# EAGLE board Qwiic_MCP9600-Panel (EAGLE 9.4.2)
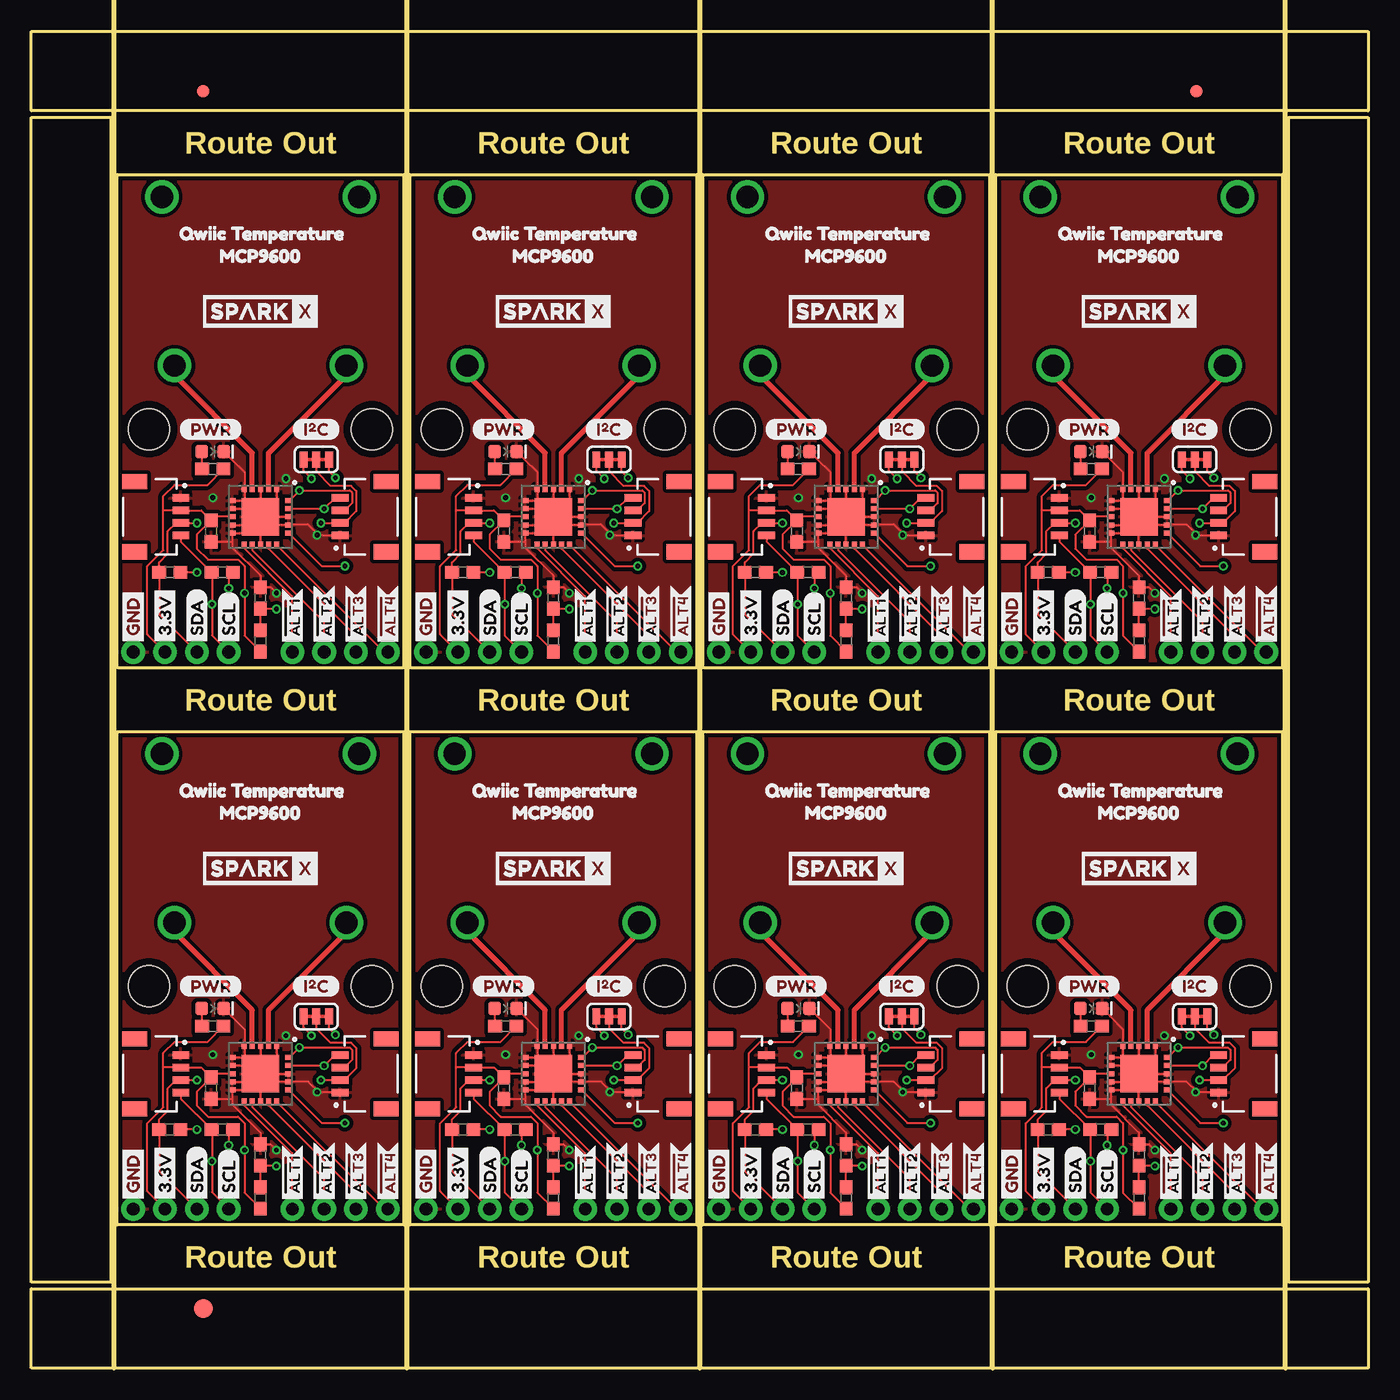
[diagram p0: board, top side]
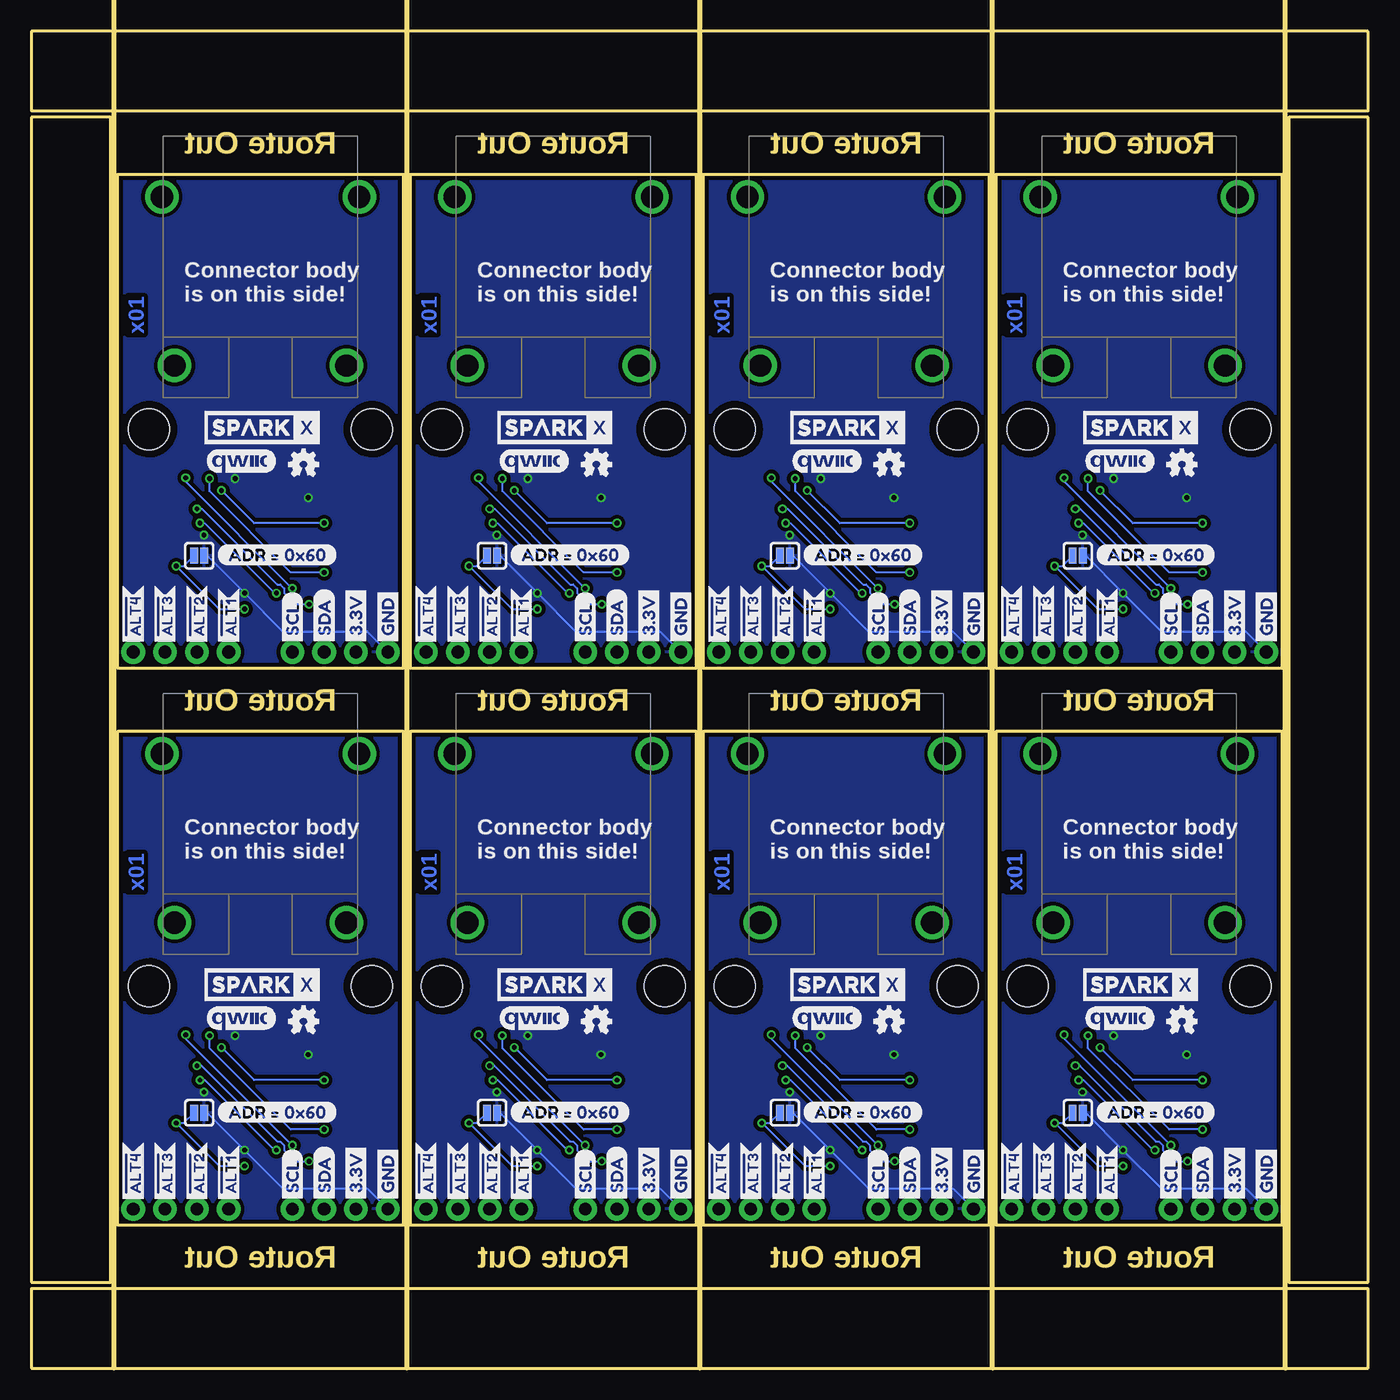
[diagram p1: board, bottom side, seen from below]

Size 106.68 x 106.68 mm. Coordinates in mm from the lower left corner, seen from the top.
Outline: 6.86,11.43 6.86,50.8 29.72,50.8 29.72,11.43 6.86,11.43
Outline: 30.23,11.43 30.23,50.8 53.09,50.8 53.09,11.43 30.23,11.43
Outline: 53.59,11.43 53.59,50.8 76.45,50.8 76.45,11.43 53.59,11.43
Outline: 76.96,11.43 76.96,50.8 99.82,50.8 99.82,11.43 76.96,11.43
Outline: 6.86,55.88 6.86,95.25 29.72,95.25 29.72,55.88 6.86,55.88
Outline: 30.23,55.88 30.23,95.25 53.09,95.25 53.09,55.88 30.23,55.88
Outline: 53.59,55.88 53.59,95.25 76.45,95.25 76.45,55.88 53.59,55.88
Outline: 76.96,55.88 76.96,95.25 99.82,95.25 99.82,55.88 76.96,55.88
Outline: 0,6.35 106.68,6.35 106.68,0 0,0 0,6.35
Outline: 100.33,99.82 106.68,99.82 106.68,6.86 100.33,6.86 100.33,99.82
Outline: 0,106.68 106.68,106.68 106.68,100.33 0,100.33 0,106.68
Outline: 0,99.82 6.35,99.82 6.35,6.86 0,6.86 0,99.82
Copper layers (1*16): Top 0.035mm / dielectric 1.5mm / Bottom 0.035mm
Design rules "SparkFun-2-layer-PCBWay-LIMIT": minimum track width 6mil, minimum drill 0.3mm, track to track 6mil, track to pad 6mil, pad to pad 6mil, via to via 6mil, smd to smd 6mil, copper to edge 6mil, drill to drill 6mil, minimum pad ring 6mil, minimum via ring 6mil, stop-mask expansion 4mil, vias tented up to drill 25mil, thermal gap 10mil
Milling: 5 lines

## Footprints (pad centres in the part's own frame; a part is rotated, then mirrored left to right if it is on the bottom)
0603 = smd 1.1 x 1: 1 -0.85,0; 2 0.85,0
LED-0603 = smd 1 x 1: A -0.877,0; C 0.877,0
FIDUCIAL-1X2 = smd 1 x 1: 1 0,0
FIDUCIAL-1.5X3 = smd 1.5 x 1.5: 1 0,0
SMT-JUMPER_3_2-NC_TRACE_SILK = smd 0.635 x 1.27: 1 -1.016,0; 2 0,0; 3 1.016,0
1X04_NO_SILK = drill 1.016 pad 1.88: 1 0,0; 2 2.54,0; 3 5.08,0; 4 7.62,0
JST04_1MM_RA = smd 0.6 x 1.35: 1 -1.5,0; 2 -0.5,0; 3 0.5,0; 4 1.5,0 | smd 1.2 x 2: NC1 2.8,-3.675; NC2 -2.8,-3.675
SMT-JUMPER_2_NO_SILK = smd 0.635 x 1.27: 1 -0.406,0; 2 0.406,0
PCC-SMP = drill 1.778: + 6.858,0; - -6.858,0; CLIP1 -7.874,-13.462; CLIP2 7.874,-13.462
STAND-OFF = hole 3.302: 0,0
MQFN-20 = smd 0.55 x 0.4: 1 -2.25,1.3; 2 -2.25,0.65; 3 -2.25,0; 4 -2.25,-0.65; 5 -2.25,-1.3; 11 2.25,-1.3; 12 2.25,-0.65; 13 2.25,0; 14 2.25,0.65; 15 2.25,1.3 | smd 0.4 x 0.55: 6 -1.3,-2.25; 7 -0.65,-2.25; 8 0,-2.25; 9 0.65,-2.25; 10 1.3,-2.25; 16 1.3,2.25; 17 0.65,2.25; 18 0,2.25; 19 -0.65,2.25; 20 -1.3,2.25 | smd 3 x 3: 21 0,0

## Placement (x,y rotation side)
C1  0.1uF  [0603]  14.35,22.35 270 top
C2  0.1uF  [0603]  37.72,22.35 270 top
C3  0.1uF  [0603]  61.09,22.35 270 top
C4  0.1uF  [0603]  84.45,22.35 270 top
C5  0.1uF  [0603]  14.35,66.8 270 top
C6  0.1uF  [0603]  37.72,66.8 270 top
C7  0.1uF  [0603]  61.09,66.8 270 top
C8  0.1uF  [0603]  84.45,66.8 270 top
D1  RED  [LED-0603]  14.48,28.7 0 top
D2  RED  [LED-0603]  37.85,28.7 0 top
D3  RED  [LED-0603]  61.21,28.7 0 top
D4  RED  [LED-0603]  84.58,28.7 0 top
D5  RED  [LED-0603]  14.48,73.15 0 top
D6  RED  [LED-0603]  37.85,73.15 0 top
D7  RED  [LED-0603]  61.21,73.15 0 top
D8  RED  [LED-0603]  84.58,73.15 0 top
E$1  [FIDUCIAL-1X2]  13.72,101.92 0 top
E$2  [FIDUCIAL-1X2]  92.96,101.92 0 top
E$3  [FIDUCIAL-1.5X3]  13.72,4.76 0 top
I2C  [SMT-JUMPER_3_2-NC_TRACE_SILK]  22.73,28.07 180 top
I2C1  [SMT-JUMPER_3_2-NC_TRACE_SILK]  46.1,28.07 180 top
I2C2  [SMT-JUMPER_3_2-NC_TRACE_SILK]  69.47,28.07 180 top
I2C3  [SMT-JUMPER_3_2-NC_TRACE_SILK]  92.84,28.07 180 top
I2C4  [SMT-JUMPER_3_2-NC_TRACE_SILK]  22.73,72.52 180 top
I2C5  [SMT-JUMPER_3_2-NC_TRACE_SILK]  46.1,72.52 180 top
I2C6  [SMT-JUMPER_3_2-NC_TRACE_SILK]  69.47,72.52 180 top
I2C7  [SMT-JUMPER_3_2-NC_TRACE_SILK]  92.84,72.52 180 top
J1  PTH  [1X04_NO_SILK]  8.13,12.7 0 top
J2  [JST04_1MM_RA]  24.64,23.49 90 top
J3  [JST04_1MM_RA]  11.94,23.49 270 top
J4  [1X04_NO_SILK]  20.83,12.7 0 top
J5  PTH  [1X04_NO_SILK]  31.5,12.7 0 top
J6  [JST04_1MM_RA]  35.31,23.49 270 top
J7  [JST04_1MM_RA]  48.01,23.49 90 top
J8  [1X04_NO_SILK]  44.2,12.7 0 top
J9  PTH  [1X04_NO_SILK]  54.86,12.7 0 top
J10  [JST04_1MM_RA]  58.67,23.49 270 top
J11  [JST04_1MM_RA]  71.37,23.49 90 top
J12  [1X04_NO_SILK]  67.56,12.7 0 top
J13  PTH  [1X04_NO_SILK]  78.23,12.7 0 top
J14  [JST04_1MM_RA]  82.04,23.49 270 top
J15  [JST04_1MM_RA]  94.74,23.49 90 top
J16  [1X04_NO_SILK]  90.93,12.7 0 top
J17  PTH  [1X04_NO_SILK]  8.13,57.15 0 top
J18  [JST04_1MM_RA]  11.94,67.94 270 top
J19  [JST04_1MM_RA]  24.64,67.94 90 top
J20  [1X04_NO_SILK]  20.83,57.15 0 top
J21  PTH  [1X04_NO_SILK]  31.5,57.15 0 top
J22  [JST04_1MM_RA]  35.31,67.94 270 top
J23  [JST04_1MM_RA]  48.01,67.94 90 top
J24  [1X04_NO_SILK]  44.2,57.15 0 top
J25  PTH  [1X04_NO_SILK]  54.86,57.15 0 top
J26  [JST04_1MM_RA]  58.67,67.94 270 top
J27  [JST04_1MM_RA]  71.37,67.94 90 top
J28  [1X04_NO_SILK]  67.56,57.15 0 top
J29  PTH  [1X04_NO_SILK]  78.23,57.15 0 top
J30  [JST04_1MM_RA]  82.04,67.94 270 top
J31  [JST04_1MM_RA]  94.74,67.94 90 top
J32  [1X04_NO_SILK]  90.93,57.15 0 top
JP1  [SMT-JUMPER_2_NO_SILK]  23.18,20.38 0 bottom
JP2  PCB_THERMOCOUPLE  [PCC-SMP]  18.29,35.56 180 bottom
JP3  [SMT-JUMPER_2_NO_SILK]  46.55,20.38 0 bottom
JP4  STAND-OFF  [STAND-OFF]  50.55,30.48 0 top
JP5  STAND-OFF  [STAND-OFF]  32.77,30.48 0 top
JP6  PCB_THERMOCOUPLE  [PCC-SMP]  41.66,35.56 180 bottom
JP7  [SMT-JUMPER_2_NO_SILK]  69.91,20.38 0 bottom
JP8  STAND-OFF  [STAND-OFF]  27.18,30.48 0 top
JP9  STAND-OFF  [STAND-OFF]  9.4,30.48 0 top
JP10  STAND-OFF  [STAND-OFF]  73.91,30.48 0 top
JP11  STAND-OFF  [STAND-OFF]  56.13,30.48 0 top
JP12  PCB_THERMOCOUPLE  [PCC-SMP]  65.02,35.56 180 bottom
JP13  [SMT-JUMPER_2_NO_SILK]  93.28,20.38 0 bottom
JP14  STAND-OFF  [STAND-OFF]  97.28,30.48 0 top
JP15  STAND-OFF  [STAND-OFF]  79.5,30.48 0 top
JP16  PCB_THERMOCOUPLE  [PCC-SMP]  88.39,35.56 180 bottom
JP17  [SMT-JUMPER_2_NO_SILK]  23.18,64.83 0 bottom
JP18  STAND-OFF  [STAND-OFF]  27.18,74.93 0 top
JP19  STAND-OFF  [STAND-OFF]  9.4,74.93 0 top
JP20  PCB_THERMOCOUPLE  [PCC-SMP]  18.29,80.01 180 bottom
JP21  [SMT-JUMPER_2_NO_SILK]  46.55,64.83 0 bottom
JP22  STAND-OFF  [STAND-OFF]  50.55,74.93 0 top
JP23  STAND-OFF  [STAND-OFF]  32.77,74.93 0 top
JP24  PCB_THERMOCOUPLE  [PCC-SMP]  41.66,80.01 180 bottom
JP25  [SMT-JUMPER_2_NO_SILK]  69.91,64.83 0 bottom
JP26  STAND-OFF  [STAND-OFF]  73.91,74.93 0 top
JP27  STAND-OFF  [STAND-OFF]  56.13,74.93 0 top
JP28  PCB_THERMOCOUPLE  [PCC-SMP]  65.02,80.01 180 bottom
JP29  [SMT-JUMPER_2_NO_SILK]  93.28,64.83 0 bottom
JP30  STAND-OFF  [STAND-OFF]  97.28,74.93 0 top
JP31  STAND-OFF  [STAND-OFF]  79.5,74.93 0 top
JP32  PCB_THERMOCOUPLE  [PCC-SMP]  88.39,80.01 180 bottom
LOGO1  OSHW-LOGOMINI  [OSHW-LOGO-MINI]  14.86,27.69 0 bottom
LOGO2  OSHW-LOGOMINI  [OSHW-LOGO-MINI]  38.23,27.69 0 bottom
LOGO3  OSHW-LOGOMINI  [OSHW-LOGO-MINI]  61.59,27.69 0 bottom
LOGO4  OSHW-LOGOMINI  [OSHW-LOGO-MINI]  84.96,27.69 0 bottom
LOGO5  OSHW-LOGOMINI  [OSHW-LOGO-MINI]  14.86,72.14 0 bottom
LOGO6  OSHW-LOGOMINI  [OSHW-LOGO-MINI]  38.23,72.14 0 bottom
LOGO7  OSHW-LOGOMINI  [OSHW-LOGO-MINI]  61.59,72.14 0 bottom
LOGO8  OSHW-LOGOMINI  [OSHW-LOGO-MINI]  84.96,72.14 0 bottom
R1  1k  [0603]  14.48,27.3 180 top
R2  43k  [0603]  18.29,17.02 90 top
R3  10k  [0603]  18.29,13.59 270 top
R4  2.2k  [0603]  11.05,19.05 0 top
R5  2.2k  [0603]  15.24,19.05 0 top
R6  1k  [0603]  37.85,27.3 180 top
R7  43k  [0603]  41.66,17.02 90 top
R8  2.2k  [0603]  34.42,19.05 0 top
R9  2.2k  [0603]  38.61,19.05 0 top
R10  10k  [0603]  41.66,13.59 270 top
R11  1k  [0603]  61.21,27.3 180 top
R12  43k  [0603]  65.02,17.02 90 top
R13  2.2k  [0603]  57.78,19.05 0 top
R14  2.2k  [0603]  61.98,19.05 0 top
R15  10k  [0603]  65.02,13.59 270 top
R16  1k  [0603]  84.58,27.3 180 top
R17  43k  [0603]  88.39,17.02 90 top
R18  2.2k  [0603]  81.15,19.05 0 top
R19  2.2k  [0603]  85.34,19.05 0 top
R20  10k  [0603]  88.39,13.59 270 top
R21  1k  [0603]  14.48,71.75 180 top
R22  43k  [0603]  18.29,61.47 90 top
R23  2.2k  [0603]  11.05,63.5 0 top
R24  2.2k  [0603]  15.24,63.5 0 top
R25  10k  [0603]  18.29,58.04 270 top
R26  1k  [0603]  37.85,71.75 180 top
R27  43k  [0603]  41.66,61.47 90 top
R28  2.2k  [0603]  34.42,63.5 0 top
R29  2.2k  [0603]  38.61,63.5 0 top
R30  10k  [0603]  41.66,58.04 270 top
R31  1k  [0603]  61.21,71.75 180 top
R32  43k  [0603]  65.02,61.47 90 top
R33  2.2k  [0603]  57.78,63.5 0 top
R34  2.2k  [0603]  61.98,63.5 0 top
R35  10k  [0603]  65.02,58.04 270 top
R36  1k  [0603]  84.58,71.75 180 top
R37  43k  [0603]  88.39,61.47 90 top
R38  2.2k  [0603]  81.15,63.5 0 top
R39  2.2k  [0603]  85.34,63.5 0 top
R40  10k  [0603]  88.39,58.04 270 top
U1  MCP9600-SMD  [MQFN-20]  41.66,23.49 270 top
U2  MCP9600-SMD  [MQFN-20]  65.02,23.49 270 top
U3  MCP9600-SMD  [MQFN-20]  88.39,23.49 270 top
U4  MCP9600-SMD  [MQFN-20]  18.29,67.94 270 top
U5  MCP9600-SMD  [MQFN-20]  41.66,67.94 270 top
U6  MCP9600-SMD  [MQFN-20]  65.02,67.94 270 top
U7  MCP9600-SMD  [MQFN-20]  88.39,67.94 270 top
U16  MCP9600-SMD  [MQFN-20]  18.29,23.49 270 top
U$1  [#ALT30]  25.91,12.89 90 top
U$2  [SPARKX-MEDIUM]  18.16,30.61 0 bottom
U$3  [#ALT10]  20.83,12.89 90 bottom
U$4  [#ALT20]  23.37,12.89 90 bottom
U$5  [#ALT30]  25.91,12.89 90 bottom
U$6  [QWIIC_TEMPERATURE2]  10.92,46.1 0 top
U$7  [#ALT40]  28.45,12.89 90 bottom
U$8  [#ALT10]  20.83,12.89 90 top
U$9  [SCL-[)]  15.75,13.08 90 bottom
U$10  [GND-04]  8.13,13.08 90 top
U$11  [#ALT40]  28.45,12.89 90 top
U$12  [SCL-[)]  15.75,13.08 90 top
U$13  [SDA-[)]  13.21,13.08 90 top
U$14  [SDA-[)]  13.21,13.08 90 bottom
U$15  [QWIIC_5.5MM]  19.81,27.94 0 bottom
U$16  [QWIIC_TEMPERATURE2]  34.29,46.1 0 top
U$17  [SPARKX-MEDIUM]  18.29,39.88 0 top
U$18  [#ALT20]  23.37,12.89 90 top
U$19  [3.3V]  10.67,13.08 90 top
U$20  [PWR-()-04]  11.81,30.48 0 top
U$21  [I_SUPER2_C-()-04]  20.83,30.48 0 top
U$22  [3.3V]  10.67,13.08 90 bottom
U$23  [GND-04]  8.13,13.08 90 bottom
U$24  [SPARKX-MEDIUM]  41.53,30.61 0 bottom
U$25  [MCP96000]  14.1,44.32 0 top
U$26  [SPARKX-MEDIUM]  41.66,39.88 0 top
U$27  [ADR_#_0X600]  21.78,20.45 0 bottom
U$28  [SCL-[)]  39.12,13.08 90 bottom
U$29  [PWR-()-04]  35.18,30.48 0 top
U$30  [I_SUPER2_C-()-04]  44.2,30.48 0 top
U$31  [3.3V]  34.04,13.08 90 top
U$32  [3.3V]  34.04,13.08 90 bottom
U$33  [GND-04]  31.5,13.08 90 bottom
U$34  [GND-04]  31.5,13.08 90 top
U$35  [SCL-[)]  39.12,13.08 90 top
U$36  [SDA-[)]  36.58,13.08 90 top
U$37  [SDA-[)]  36.58,13.08 90 bottom
U$38  [QWIIC_5.5MM]  43.18,27.94 0 bottom
U$39  [MCP96000]  37.46,44.32 0 top
U$40  [ADR_#_0X600]  45.15,20.45 0 bottom
U$41  [#ALT10]  44.2,12.89 90 bottom
U$42  [#ALT20]  46.74,12.89 90 bottom
U$43  [#ALT30]  49.28,12.89 90 bottom
U$44  [#ALT40]  51.82,12.89 90 bottom
U$45  [#ALT10]  44.2,12.89 90 top
U$46  [#ALT20]  46.74,12.89 90 top
U$47  [#ALT30]  49.28,12.89 90 top
U$48  [#ALT40]  51.82,12.89 90 top
U$49  [QWIIC_TEMPERATURE2]  57.66,46.1 0 top
U$50  [SPARKX-MEDIUM]  64.9,30.61 0 bottom
U$51  [SPARKX-MEDIUM]  65.02,39.88 0 top
U$52  [SCL-[)]  62.48,13.08 90 bottom
U$53  [PWR-()-04]  58.55,30.48 0 top
U$54  [I_SUPER2_C-()-04]  67.56,30.48 0 top
U$55  [3.3V]  57.4,13.08 90 top
U$56  [3.3V]  57.4,13.08 90 bottom
U$57  [GND-04]  54.86,13.08 90 bottom
U$58  [GND-04]  54.86,13.08 90 top
U$59  [SCL-[)]  62.48,13.08 90 top
U$60  [SDA-[)]  59.94,13.08 90 top
U$61  [SDA-[)]  59.94,13.08 90 bottom
U$62  [QWIIC_5.5MM]  66.55,27.94 0 bottom
U$63  [MCP96000]  60.83,44.32 0 top
U$64  [ADR_#_0X600]  68.52,20.45 0 bottom
U$65  [#ALT10]  67.56,12.89 90 bottom
U$66  [#ALT20]  70.1,12.89 90 bottom
U$67  [#ALT30]  72.64,12.89 90 bottom
U$68  [#ALT40]  75.18,12.89 90 bottom
U$69  [#ALT10]  67.56,12.89 90 top
U$70  [#ALT20]  70.1,12.89 90 top
U$71  [#ALT30]  72.64,12.89 90 top
U$72  [#ALT40]  75.18,12.89 90 top
U$73  [QWIIC_TEMPERATURE2]  81.03,46.1 0 top
U$74  [SPARKX-MEDIUM]  88.27,30.61 0 bottom
U$75  [SPARKX-MEDIUM]  88.39,39.88 0 top
U$76  [SCL-[)]  85.85,13.08 90 bottom
U$77  [PWR-()-04]  81.92,30.48 0 top
U$78  [I_SUPER2_C-()-04]  90.93,30.48 0 top
U$79  [3.3V]  80.77,13.08 90 top
U$80  [3.3V]  80.77,13.08 90 bottom
U$81  [GND-04]  78.23,13.08 90 bottom
U$82  [GND-04]  78.23,13.08 90 top
U$83  [SCL-[)]  85.85,13.08 90 top
U$84  [SDA-[)]  83.31,13.08 90 top
U$85  [SDA-[)]  83.31,13.08 90 bottom
U$86  [QWIIC_5.5MM]  89.92,27.94 0 bottom
U$87  [MCP96000]  84.2,44.32 0 top
U$88  [ADR_#_0X600]  91.88,20.45 0 bottom
U$89  [#ALT10]  90.93,12.89 90 bottom
U$90  [#ALT20]  93.47,12.89 90 bottom
U$91  [#ALT30]  96.01,12.89 90 bottom
U$92  [#ALT40]  98.55,12.89 90 bottom
U$93  [#ALT10]  90.93,12.89 90 top
U$94  [#ALT20]  93.47,12.89 90 top
U$95  [#ALT30]  96.01,12.89 90 top
U$96  [#ALT40]  98.55,12.89 90 top
U$97  [QWIIC_TEMPERATURE2]  10.92,90.55 0 top
U$98  [SPARKX-MEDIUM]  18.16,75.06 0 bottom
U$99  [SPARKX-MEDIUM]  18.29,84.33 0 top
U$100  [SCL-[)]  15.75,57.53 90 bottom
U$101  [PWR-()-04]  11.81,74.93 0 top
U$102  [I_SUPER2_C-()-04]  20.83,74.93 0 top
U$103  [3.3V]  10.67,57.53 90 top
U$104  [3.3V]  10.67,57.53 90 bottom
U$105  [GND-04]  8.13,57.53 90 bottom
U$106  [GND-04]  8.13,57.53 90 top
U$107  [SCL-[)]  15.75,57.53 90 top
U$108  [SDA-[)]  13.21,57.53 90 top
U$109  [SDA-[)]  13.21,57.53 90 bottom
U$110  [QWIIC_5.5MM]  19.81,72.39 0 bottom
U$111  [MCP96000]  14.1,88.77 0 top
U$112  [ADR_#_0X600]  21.78,64.9 0 bottom
U$113  [#ALT10]  20.83,57.34 90 bottom
U$114  [#ALT20]  23.37,57.34 90 bottom
U$115  [#ALT30]  25.91,57.34 90 bottom
U$116  [#ALT40]  28.45,57.34 90 bottom
U$117  [#ALT10]  20.83,57.34 90 top
U$118  [#ALT20]  23.37,57.34 90 top
U$119  [#ALT30]  25.91,57.34 90 top
U$120  [#ALT40]  28.45,57.34 90 top
U$121  [QWIIC_TEMPERATURE2]  34.29,90.55 0 top
U$122  [SPARKX-MEDIUM]  41.53,75.06 0 bottom
U$123  [SPARKX-MEDIUM]  41.66,84.33 0 top
U$124  [SCL-[)]  39.12,57.53 90 bottom
U$125  [PWR-()-04]  35.18,74.93 0 top
U$126  [I_SUPER2_C-()-04]  44.2,74.93 0 top
U$127  [3.3V]  34.04,57.53 90 top
U$128  [3.3V]  34.04,57.53 90 bottom
U$129  [GND-04]  31.5,57.53 90 bottom
U$130  [GND-04]  31.5,57.53 90 top
U$131  [SCL-[)]  39.12,57.53 90 top
U$132  [SDA-[)]  36.58,57.53 90 top
U$133  [SDA-[)]  36.58,57.53 90 bottom
U$134  [QWIIC_5.5MM]  43.18,72.39 0 bottom
U$135  [MCP96000]  37.46,88.77 0 top
U$136  [ADR_#_0X600]  45.15,64.9 0 bottom
U$137  [#ALT10]  44.2,57.34 90 bottom
U$138  [#ALT20]  46.74,57.34 90 bottom
U$139  [#ALT30]  49.28,57.34 90 bottom
U$140  [#ALT40]  51.82,57.34 90 bottom
U$141  [#ALT10]  44.2,57.34 90 top
U$142  [#ALT20]  46.74,57.34 90 top
U$143  [#ALT30]  49.28,57.34 90 top
U$144  [#ALT40]  51.82,57.34 90 top
U$145  [QWIIC_TEMPERATURE2]  57.66,90.55 0 top
U$146  [SPARKX-MEDIUM]  64.9,75.06 0 bottom
U$147  [SPARKX-MEDIUM]  65.02,84.33 0 top
U$148  [SCL-[)]  62.48,57.53 90 bottom
U$149  [PWR-()-04]  58.55,74.93 0 top
U$150  [I_SUPER2_C-()-04]  67.56,74.93 0 top
U$151  [3.3V]  57.4,57.53 90 top
U$152  [3.3V]  57.4,57.53 90 bottom
U$153  [GND-04]  54.86,57.53 90 bottom
U$154  [GND-04]  54.86,57.53 90 top
U$155  [SCL-[)]  62.48,57.53 90 top
U$156  [SDA-[)]  59.94,57.53 90 top
U$157  [SDA-[)]  59.94,57.53 90 bottom
U$158  [QWIIC_5.5MM]  66.55,72.39 0 bottom
U$159  [MCP96000]  60.83,88.77 0 top
U$160  [ADR_#_0X600]  68.52,64.9 0 bottom
U$161  [#ALT10]  67.56,57.34 90 bottom
U$162  [#ALT20]  70.1,57.34 90 bottom
U$163  [#ALT30]  72.64,57.34 90 bottom
U$164  [#ALT40]  75.18,57.34 90 bottom
U$165  [#ALT10]  67.56,57.34 90 top
U$166  [#ALT20]  70.1,57.34 90 top
U$167  [#ALT30]  72.64,57.34 90 top
U$168  [#ALT40]  75.18,57.34 90 top
U$169  [QWIIC_TEMPERATURE2]  81.03,90.55 0 top
U$170  [SPARKX-MEDIUM]  88.27,75.06 0 bottom
U$171  [SPARKX-MEDIUM]  88.39,84.33 0 top
U$172  [SCL-[)]  85.85,57.53 90 bottom
U$173  [PWR-()-04]  81.92,74.93 0 top
U$174  [I_SUPER2_C-()-04]  90.93,74.93 0 top
U$175  [3.3V]  80.77,57.53 90 top
U$176  [3.3V]  80.77,57.53 90 bottom
U$177  [GND-04]  78.23,57.53 90 bottom
U$178  [GND-04]  78.23,57.53 90 top
U$179  [SCL-[)]  85.85,57.53 90 top
U$180  [SDA-[)]  83.31,57.53 90 top
U$181  [SDA-[)]  83.31,57.53 90 bottom
U$182  [QWIIC_5.5MM]  89.92,72.39 0 bottom
U$183  [MCP96000]  84.2,88.77 0 top
U$184  [ADR_#_0X600]  91.88,64.9 0 bottom
U$185  [#ALT10]  90.93,57.34 90 bottom
U$186  [#ALT20]  93.47,57.34 90 bottom
U$187  [#ALT30]  96.01,57.34 90 bottom
U$188  [#ALT40]  98.55,57.34 90 bottom
U$189  [#ALT10]  90.93,57.34 90 top
U$190  [#ALT20]  93.47,57.34 90 top
U$191  [#ALT30]  96.01,57.34 90 top
U$192  [#ALT40]  98.55,57.34 90 top

## Library data of the parts
C1-C8 = SparkFun-Capacitors; PROD_ID: CAP-00810
D1-D8 = SparkFun-LED; PROD_ID: DIO-00819
E$1 E$2 LOGO1-LOGO8 U$15 U$38 U$62 U$86 U$110 U$134 U$158 U$182 = SparkFun-Aesthetics
E$3 = SparkFun-Retired
I2C I2C1-I2C7 JP1 JP3 JP7 JP13 JP17 JP21 JP25 JP29 = SparkFun-Jumpers
J1 J5 J9 J13 J17 J21 J25 J29 U$2 U$17 U$24 U$26 U$50 U$51 U$74 U$75 U$98 U$99 U$122 U$123 U$146 U$147 U$170 U$171 = SparkX
J2 J3 J6 J7 J10 J11 J14 J15 J18 J19 J22 J23 J26 J27 J30 J31 = SparkFun-Connectors; PROD_ID: CONN-13694
J4 J8 J12 J16 J20 J24 J28 J32 = SparkFun-Connectors; PROD_ID: CONN-09696
JP2 JP6 JP12 JP16 JP20 JP24 JP28 JP32 U1-U7 U16 U$1 U$3-U$5 U$7 U$8 U$11 U$18 U$25 U$27 U$39-U$48 U$63-U$72 U$87-U$96 U$111-U$120 U$135-U$144 U$159-U$168 U$183-U$192 = MCP9600
JP4 JP5 JP8-JP11 JP14 JP15 JP18 JP19 JP22 JP23 JP26 JP27 JP30 JP31 = SparkFun
R1 R6 R11 R16 R21 R26 R31 R36 = SparkFun-Resistors; PROD_ID: RES-07856
R2 R7 R12 R17 R22 R27 R32 R37 = SparkFun-Resistors; PROD_ID: RES-07858
R3 R10 R15 R20 R25 R30 R35 R40 = SparkFun-Resistors; PROD_ID: RES-00824
R4 R5 R8 R9 R13 R14 R18 R19 R23 R24 R28 R29 R33 R34 R38 R39 = SparkFun-Resistors; PROD_ID: RES-08272
U$6 U$16 U$49 U$73 U$97 U$121 U$145 U$169 = buzzard_labels (2)
U$9 U$10 U$12-U$14 U$19-U$23 U$28-U$37 U$52-U$61 U$76-U$85 U$100-U$109 U$124-U$133 U$148-U$157 U$172-U$181 = Labels

## Nets
3.3V: C1.1 I2C.2 J1.2 J2.2 J3.2 R1.1 R3.2 U16.8
3.3V1: C2.1 I2C1.2 J5.2 J6.2 J7.2 R6.1 R10.2 U1.8
3.3V2: C3.1 I2C2.2 J9.2 J10.2 J11.2 R11.1 R15.2 U2.8
3.3V3: C4.1 I2C3.2 J13.2 J14.2 J15.2 R16.1 R20.2 U3.8
3.3V4: C5.1 I2C4.2 J17.2 J18.2 J19.2 R21.1 R25.2 U4.8
3.3V5: C6.1 I2C5.2 J21.2 J22.2 J23.2 R26.1 R30.2 U5.8
3.3V6: C7.1 I2C6.2 J25.2 J26.2 J27.2 R31.1 R35.2 U6.8
3.3V7: C8.1 I2C7.2 J29.2 J30.2 J31.2 R36.1 R40.2 U7.8
!ALT1: J4.1 U16.11
!ALT2: J4.2 U16.12
!ALT3: J4.3 U16.14
!ALT4: J4.4 U16.15
!ALT5: J8.1 U1.11
!ALT6: J8.3 U1.14
!ALT7: J8.4 U1.15
!ALT8: J8.2 U1.12
!ALT9: J12.1 U2.11
!ALT10: J12.3 U2.14
!ALT11: J12.4 U2.15
!ALT12: J12.2 U2.12
!ALT13: J16.1 U3.11
!ALT14: J16.3 U3.14
!ALT15: J16.4 U3.15
!ALT16: J16.2 U3.12
!ALT17: J20.1 U4.11
!ALT18: J20.3 U4.14
!ALT19: J20.4 U4.15
!ALT20: J20.2 U4.12
!ALT21: J24.1 U5.11
!ALT22: J24.3 U5.14
!ALT23: J24.4 U5.15
!ALT24: J24.2 U5.12
!ALT25: J28.1 U6.11
!ALT26: J28.3 U6.14
!ALT27: J28.4 U6.15
!ALT28: J28.2 U6.12
!ALT29: J32.1 U7.11
!ALT30: J32.3 U7.14
!ALT31: J32.4 U7.15
!ALT32: J32.2 U7.12
ADDR: JP1.1 R2.1 R3.1 U16.16
ADDR1: JP3.1 R7.1 R10.1 U1.16
ADDR2: JP7.1 R12.1 R15.1 U2.16
ADDR3: JP13.1 R17.1 R20.1 U3.16
ADDR4: JP17.1 R22.1 R25.1 U4.16
ADDR5: JP21.1 R27.1 R30.1 U5.16
ADDR6: JP25.1 R32.1 R35.1 U6.16
ADDR7: JP29.1 R37.1 R40.1 U7.16
GND: C1.2 D1.C J1.1 J2.1 J3.1 JP1.2 R2.2 U16.1 U16.3 U16.5 U16.6 U16.7 U16.9 U16.10 U16.13 U16.17 U16.18 U16.21
GND1: C2.2 D2.C J5.1 J6.1 J7.1 JP3.2 R7.2 U1.1 U1.3 U1.5 U1.6 U1.7 U1.9 U1.10 U1.13 U1.17 U1.18 U1.21
GND2: C3.2 D3.C J9.1 J10.1 J11.1 JP7.2 R12.2 U2.1 U2.3 U2.5 U2.6 U2.7 U2.9 U2.10 U2.13 U2.17 U2.18 U2.21
GND3: C4.2 D4.C J13.1 J14.1 J15.1 JP13.2 R17.2 U3.1 U3.3 U3.5 U3.6 U3.7 U3.9 U3.10 U3.13 U3.17 U3.18 U3.21
GND4: C5.2 D5.C J17.1 J18.1 J19.1 JP17.2 R22.2 U4.1 U4.3 U4.5 U4.6 U4.7 U4.9 U4.10 U4.13 U4.17 U4.18 U4.21
GND5: C6.2 D6.C J21.1 J22.1 J23.1 JP21.2 R27.2 U5.1 U5.3 U5.5 U5.6 U5.7 U5.9 U5.10 U5.13 U5.17 U5.18 U5.21
GND6: C7.2 D7.C J25.1 J26.1 J27.1 JP25.2 R32.2 U6.1 U6.3 U6.5 U6.6 U6.7 U6.9 U6.10 U6.13 U6.17 U6.18 U6.21
GND7: C8.2 D8.C J29.1 J30.1 J31.1 JP29.2 R37.2 U7.1 U7.3 U7.5 U7.6 U7.7 U7.9 U7.10 U7.13 U7.17 U7.18 U7.21
N$1: D1.A R1.2
N$2: I2C.1 R5.2
N$3: I2C.3 R4.2
N$4: JP2.+ U16.2
N$5: JP2.- U16.4
N$6: D2.A R6.2
N$7: I2C1.1 R9.2
N$8: I2C1.3 R8.2
N$9: JP6.+ U1.2
N$10: JP6.- U1.4
N$11: D3.A R11.2
N$12: I2C2.1 R14.2
N$13: I2C2.3 R13.2
N$14: JP12.+ U2.2
N$15: JP12.- U2.4
N$16: D4.A R16.2
N$17: I2C3.1 R19.2
N$18: I2C3.3 R18.2
N$19: JP16.+ U3.2
N$20: JP16.- U3.4
N$21: D5.A R21.2
N$22: I2C4.1 R24.2
N$23: I2C4.3 R23.2
N$24: JP20.+ U4.2
N$25: JP20.- U4.4
N$26: D6.A R26.2
N$27: I2C5.1 R29.2
N$28: I2C5.3 R28.2
N$29: JP24.+ U5.2
N$30: JP24.- U5.4
N$31: D7.A R31.2
N$32: I2C6.1 R34.2
N$33: I2C6.3 R33.2
N$34: JP28.+ U6.2
N$35: JP28.- U6.4
N$36: D8.A R36.2
N$37: I2C7.1 R39.2
N$38: I2C7.3 R38.2
N$39: JP32.+ U7.2
N$40: JP32.- U7.4
SCL: J1.4 J2.4 J3.4 R5.1 U16.19
SCL1: J5.4 J6.4 J7.4 R9.1 U1.19
SCL2: J9.4 J10.4 J11.4 R14.1 U2.19
SCL3: J13.4 J14.4 J15.4 R19.1 U3.19
SCL4: J17.4 J18.4 J19.4 R24.1 U4.19
SCL5: J21.4 J22.4 J23.4 R29.1 U5.19
SCL6: J25.4 J26.4 J27.4 R34.1 U6.19
SCL7: J29.4 J30.4 J31.4 R39.1 U7.19
SDA: J1.3 J2.3 J3.3 R4.1 U16.20
SDA1: J5.3 J6.3 J7.3 R8.1 U1.20
SDA2: J9.3 J10.3 J11.3 R13.1 U2.20
SDA3: J13.3 J14.3 J15.3 R18.1 U3.20
SDA4: J17.3 J18.3 J19.3 R23.1 U4.20
SDA5: J21.3 J22.3 J23.3 R28.1 U5.20
SDA6: J25.3 J26.3 J27.3 R33.1 U6.20
SDA7: J29.3 J30.3 J31.3 R38.1 U7.20

## Tracks (layer width: path | path; a pad name or v marks a point on that pad's centre or on a via)
3.3V  (via drill 0.38)
  Top 0.178: U16.8 14.64,23.49 C1.1 | C1.1 13.56,23.99 J3.2 10.55,23.99 10.54,24 | R1.1 14.06,26.04 11.43,26.04 10.54,25.15 10.54,24 | J1.2 9.25,14.11 9.25,19.54 10.54,20.83 10.54,24 | C1.1 13.21,22.06 13.21,20.95 14.1,20.07 16.5,20.07 17.02,19.55 v17.02,17.4 17.02,14.01 R3.2 | I2C.2 22.77,28.03 22.77,27.08 23.89,25.96 25.53,25.96 25.94,25.55 25.94,23.94 24.99,22.99 J2.2 v23.11,22.99
  Bottom 0.178: v23.11,22.99 22.73,22.99 17.14,17.4 v17.02,17.4
3.3V1  (via drill 0.38)
  Top 0.178: U1.8 38.01,23.49 C2.1 | C2.1 36.93,23.99 J6.2 33.92,23.99 33.91,24 | R6.1 37.43,26.04 34.8,26.04 33.91,25.15 33.91,24 | J5.2 32.62,14.11 32.62,19.54 33.91,20.83 33.91,24 | C2.1 36.58,22.06 36.58,20.95 37.46,20.07 39.87,20.07 40.39,19.55 v40.39,17.4 40.39,14.01 R10.2 | I2C1.2 46.14,28.03 46.14,27.08 47.26,25.96 48.9,25.96 49.3,25.55 49.3,23.94 48.36,22.99 J7.2 v46.48,22.99
  Bottom 0.178: v46.48,22.99 46.1,22.99 40.51,17.4 v40.39,17.4
3.3V2  (via drill 0.38)
  Top 0.178: U2.8 61.38,23.49 C3.1 | C3.1 60.29,23.99 J10.2 57.28,23.99 57.28,24 | R11.1 60.79,26.04 58.17,26.04 57.28,25.15 57.28,24 | J9.2 55.99,14.11 55.99,19.54 57.28,20.83 57.28,24 | C3.1 59.94,22.06 59.94,20.95 60.83,20.07 63.24,20.07 63.75,19.55 v63.75,17.4 63.75,14.01 R15.2 | I2C2.2 69.51,28.03 69.51,27.08 70.63,25.96 72.27,25.96 72.67,25.55 72.67,23.94 71.73,22.99 J11.2 71.37,22.99 v69.85,22.99
  Bottom 0.178: v69.85,22.99 69.47,22.99 63.88,17.4 v63.75,17.4
3.3V3  (via drill 0.38)
  Top 0.178: U3.8 84.75,23.49 C4.1 | C4.1 83.66,23.99 J14.2 80.65,23.99 80.65,24 | R16.1 84.16,26.04 81.53,26.04 80.65,25.15 80.65,24 | J13.2 79.36,14.11 79.36,19.54 80.65,20.83 80.65,24 | C4.1 83.31,22.06 83.31,20.95 84.2,20.07 86.61,20.07 87.12,19.55 v87.12,17.4 87.12,14.01 R20.2 | I2C3.2 92.88,28.03 92.88,27.08 94,25.96 95.63,25.96 96.04,25.55 96.04,23.94 95.09,22.99 J15.2 v93.22,22.99
  Bottom 0.178: v93.22,22.99 92.84,22.99 87.25,17.4 v87.12,17.4
3.3V4  (via drill 0.38)
  Top 0.178: U4.8 14.64,67.94 C5.1 | C5.1 13.56,68.44 J18.2 10.55,68.44 10.54,68.45 | R21.1 14.06,70.48 11.43,70.48 10.54,69.6 10.54,68.45 | J17.2 9.25,58.56 9.25,63.99 10.54,65.28 10.54,68.45 | C5.1 13.21,66.51 13.21,65.41 14.1,64.52 16.5,64.52 17.02,64 v17.02,61.85 17.02,58.46 R25.2 | I2C4.2 22.77,72.48 22.77,71.53 23.89,70.41 25.53,70.41 25.94,70 25.94,68.39 24.99,67.44 J19.2 24.63,67.44 v23.11,67.44
  Bottom 0.178: v23.11,67.44 22.73,67.44 17.14,61.85 v17.02,61.85
3.3V5  (via drill 0.38)
  Top 0.178: U5.8 38.01,67.94 C6.1 | C6.1 36.93,68.44 J22.2 33.92,68.44 33.91,68.45 | R26.1 37.43,70.48 34.8,70.48 33.91,69.6 33.91,68.45 | J21.2 32.62,58.56 32.62,63.99 33.91,65.28 33.91,68.45 | C6.1 36.58,66.51 36.58,65.41 37.46,64.52 39.87,64.52 40.39,64 v40.39,61.85 40.39,58.46 R30.2 | I2C5.2 46.14,72.48 46.14,71.53 47.26,70.41 48.9,70.41 49.3,70 49.3,68.39 48.36,67.44 J23.2 48,67.44 v46.48,67.44
  Bottom 0.178: v46.48,67.44 46.1,67.44 40.51,61.85 v40.39,61.85
3.3V6  (via drill 0.38)
  Top 0.178: U6.8 61.38,67.94 C7.1 | C7.1 60.29,68.44 J26.2 57.28,68.44 57.28,68.45 | R31.1 60.79,70.48 58.17,70.48 57.28,69.6 57.28,68.45 | J25.2 55.99,58.56 55.99,63.99 57.28,65.28 57.28,68.45 | C7.1 59.94,66.51 59.94,65.41 60.83,64.52 63.24,64.52 63.75,64 v63.75,61.85 63.75,58.46 R35.2 | I2C6.2 69.51,72.48 69.51,71.53 70.63,70.41 72.27,70.41 72.67,70 72.67,68.39 71.73,67.44 J27.2 71.37,67.44 v69.85,67.44
  Bottom 0.178: v69.85,67.44 69.47,67.44 63.88,61.85 v63.75,61.85
3.3V7  (via drill 0.38)
  Top 0.178: U7.8 84.75,67.94 C8.1 | C8.1 83.66,68.44 J30.2 80.65,68.44 80.65,68.45 | R36.1 84.16,70.48 81.53,70.48 80.65,69.6 80.65,68.45 | J29.2 79.36,58.56 79.36,63.99 80.65,65.28 80.65,68.45 | C8.1 83.31,66.51 83.31,65.41 84.2,64.52 86.61,64.52 87.12,64 v87.12,61.85 87.12,58.46 R40.2 | I2C7.2 92.88,72.48 92.88,71.53 94,70.41 95.63,70.41 96.04,70 96.04,68.39 95.09,67.44 J31.2 94.73,67.44 v93.22,67.44
  Bottom 0.178: v93.22,67.44 92.84,67.44 87.25,61.85 v87.12,61.85
!ALT1
  Top 0.178: J4.1 20.83,17.14 16.99,20.98 U16.11
!ALT2
  Top 0.178: J4.2 23.37,15.11 17.64,20.84 U16.12
!ALT3
  Top 0.178: U16.14 18.94,20.95 25.91,13.98 J4.3
!ALT4
  Top 0.178: U16.15 28.13,12.7 J4.4
!ALT5
  Top 0.178: J8.1 44.2,17.14 40.36,20.98 U1.11
!ALT6
  Top 0.178: U1.14 42.31,20.95 49.28,13.98 J8.3
!ALT7
  Top 0.178: U1.15 51.5,12.7 J8.4
!ALT8
  Top 0.178: J8.2 46.74,15.11 41.01,20.84 U1.12
!ALT9
  Top 0.178: J12.1 67.56,17.14 63.72,20.98 U2.11
!ALT10
  Top 0.178: U2.14 65.67,20.95 72.64,13.98 J12.3
!ALT11
  Top 0.178: U2.15 74.87,12.7 J12.4
!ALT12
  Top 0.178: J12.2 70.1,15.11 64.37,20.84 U2.12
!ALT13
  Top 0.178: J16.1 90.93,17.14 87.09,20.98 U3.11
!ALT14
  Top 0.178: U3.14 89.04,20.95 96.01,13.98 J16.3
!ALT15
  Top 0.178: U3.15 98.24,12.7 J16.4
!ALT16
  Top 0.178: J16.2 93.47,15.11 87.74,20.84 U3.12
!ALT17
  Top 0.178: J20.1 20.83,61.59 16.99,65.44 U4.11
!ALT18
  Top 0.178: U4.14 18.94,65.41 25.91,58.44 J20.3
!ALT19
  Top 0.178: U4.15 28.13,57.15 J20.4
!ALT20
  Top 0.178: J20.2 23.37,59.56 17.64,65.29 U4.12
!ALT21
  Top 0.178: J24.1 44.2,61.59 40.36,65.44 U5.11
!ALT22
  Top 0.178: U5.14 42.31,65.41 49.28,58.44 J24.3
!ALT23
  Top 0.178: U5.15 51.5,57.15 J24.4
!ALT24
  Top 0.178: J24.2 46.74,59.56 41.01,65.29 U5.12
!ALT25
  Top 0.178: J28.1 67.56,61.59 63.72,65.44 U6.11
!ALT26
  Top 0.178: U6.14 65.67,65.41 72.64,58.44 J28.3
!ALT27
  Top 0.178: U6.15 74.87,57.15 J28.4
!ALT28
  Top 0.178: J28.2 70.1,59.56 64.37,65.29 U6.12
!ALT29
  Top 0.178: J32.1 90.93,61.59 87.09,65.44 U7.11
!ALT30
  Top 0.178: U7.14 89.04,65.41 96.01,58.44 J32.3
!ALT31
  Top 0.178: U7.15 98.24,57.15 J32.4
!ALT32
  Top 0.178: J32.2 93.47,59.56 87.74,65.29 U7.12
ADDR  (via drill 0.38)
  Top 0.178: R3.1 R2.1 19.52,16.17 v19.56,16.13 | v25.02,19.56 23.18,19.56 U16.16
  Bottom 0.178: v19.56,16.13 21.59,16.13 v25.02,19.56 24.41,19.56 JP1.1
ADDR1  (via drill 0.38)
  Top 0.178: R10.1 R7.1 42.89,16.17 v42.93,16.13 | v48.39,19.56 46.54,19.56 U1.16
  Bottom 0.178: v42.93,16.13 44.96,16.13 v48.39,19.56 47.78,19.56 JP3.1
ADDR2  (via drill 0.38)
  Top 0.178: R15.1 R12.1 66.25,16.17 v66.29,16.13 | v71.76,19.56 69.91,19.56 U2.16
  Bottom 0.178: v66.29,16.13 68.33,16.13 v71.76,19.56 71.15,19.56 JP7.1
ADDR3  (via drill 0.38)
  Top 0.178: R20.1 R17.1 89.62,16.17 v89.66,16.13 | v95.12,19.56 93.28,19.56 U3.16
  Bottom 0.178: v89.66,16.13 91.69,16.13 v95.12,19.56 94.51,19.56 JP13.1
ADDR4  (via drill 0.38)
  Top 0.178: R25.1 R22.1 19.52,60.62 v19.56,60.58 | v25.02,64.01 23.18,64.01 U4.16
  Bottom 0.178: v19.56,60.58 21.59,60.58 v25.02,64.01 24.41,64.01 JP17.1
ADDR5  (via drill 0.38)
  Top 0.178: R30.1 R27.1 42.89,60.62 v42.93,60.58 | v48.39,64.01 46.54,64.01 U5.16
  Bottom 0.178: v42.93,60.58 44.96,60.58 v48.39,64.01 47.78,64.01 JP21.1
ADDR6  (via drill 0.38)
  Top 0.178: R35.1 R32.1 66.25,60.62 v66.29,60.58 | v71.76,64.01 69.91,64.01 U6.16
  Bottom 0.178: v66.29,60.58 68.33,60.58 v71.76,64.01 71.15,64.01 JP25.1
ADDR7  (via drill 0.38)
  Top 0.178: R40.1 R37.1 89.62,60.62 v89.66,60.58 | v95.12,64.01 93.28,64.01 U7.16
  Bottom 0.178: v89.66,60.58 91.69,60.58 v95.12,64.01 94.51,64.01 JP29.1
GND  (via drill 0.38)
  Top 0.178: U16.1 19.59,24.16 | 18.29,22.86 18.3,22.84 | J2.1 22.96,21.99 22.1,22.86 20.55,22.86 U16.17 18.3,22.84 | 17.02,24.13 17,24.14 U16.7 | D1.C 15.98,28.07 15.99,28.07 17.02,27.04 17.02,25.71 | 16.04,21.46 U16.10 17.62,22.2 18.29,22.86 | 16.04,21.46 16.04,21.05 18.29,18.8 R2.2 19.09,17.87 v19.56,17.4 | U16.3 18.29,24.13 | U16.5 17.02,25.71 | 17.02,25.71 17.02,24.77 | 17.02,24.77 17.02,24.13 | 16.04,21.46 16,21.5 C1.2 | U16.13 18.29,22.83 | 18.3,22.84 18.29,22.83 | 17.02,24.13 18.29,22.86 | U16.6 16.99,24.8 17.02,24.77 | U16.18 U16.21 18.29,22.86 | 18.29,22.86 18.29,22.83 | U16.9 18.3,22.84
  Bottom 0.178: JP1.2 22.54,20.38 v19.56,17.4 16.51,14.35 9.78,14.35 J1.1
  other vias: 22.8,22.03 14.48,25.02 20.32,26.54
  pour Top (isolate 0.305): 6.86,11.43 6.86,50.8 29.72,50.8 29.72,11.43
  pour Top (isolate 0.305): 29.72,11.43 29.72,50.8 6.86,50.8 6.86,11.43
  pour Top (isolate 0.305): 6.86,11.43 6.86,50.8 29.72,50.8 29.72,11.43
  pour Top (isolate 0.305): 29.72,50.8 6.86,50.8 6.86,11.43 29.72,11.43
  pour Top (isolate 0.305): 6.86,11.43 29.72,11.43 29.72,50.8 6.86,50.8
  pour Top (isolate 0.305): 29.72,50.8 6.86,50.8 6.86,11.43 29.72,11.43
  pour Top (isolate 0.305): 6.86,11.43 6.86,50.8 29.72,50.8 29.72,11.43
  pour Bottom (isolate 0.305): 29.72,11.43 29.72,50.8 6.86,50.8 6.86,11.43
  pour Top (isolate 0.305): 6.86,11.43 6.86,50.8 29.72,50.8 29.72,11.43
GND1  (via drill 0.38)
  Top 0.178: U1.1 42.96,24.16 | 41.66,22.86 41.67,22.84 | J7.1 46.33,21.99 45.47,22.86 43.92,22.86 U1.17 41.67,22.84 | 40.39,24.13 40.37,24.14 U1.7 | D2.C 39.35,28.07 39.36,28.07 40.39,27.04 40.39,25.71 | 39.41,21.46 U1.10 40.99,22.2 41.66,22.86 | 39.41,21.46 39.41,21.05 41.66,18.8 R7.2 42.46,17.87 v42.93,17.4 | U1.3 41.66,24.13 | U1.5 40.39,25.71 | 40.39,25.71 40.39,24.77 | 40.39,24.77 40.39,24.13 | 39.41,21.46 39.37,21.5 C2.2 | U1.13 41.66,22.83 | 41.67,22.84 41.66,22.83 | 40.39,24.13 41.66,22.86 | U1.6 40.36,24.8 40.39,24.77 | U1.18 U1.21 41.66,22.86 | 41.66,22.86 41.66,22.83 | U1.9 41.67,22.84
  Bottom 0.178: JP3.2 45.91,20.38 v42.93,17.4 39.88,14.35 33.15,14.35 J5.1
  other vias: 46.16,22.03 37.85,25.02 43.69,26.54
  pour Top (isolate 0.305): 30.23,11.43 30.23,50.8 53.09,50.8 53.09,11.43
  pour Top (isolate 0.305): 53.09,11.43 53.09,50.8 30.23,50.8 30.23,11.43
  pour Top (isolate 0.305): 30.23,11.43 30.23,50.8 53.09,50.8 53.09,11.43
  pour Top (isolate 0.305): 53.09,50.8 30.23,50.8 30.23,11.43 53.09,11.43
  pour Top (isolate 0.305): 30.23,11.43 53.09,11.43 53.09,50.8 30.23,50.8
  pour Top (isolate 0.305): 53.09,50.8 30.23,50.8 30.23,11.43 53.09,11.43
  pour Top (isolate 0.305): 30.23,11.43 30.23,50.8 53.09,50.8 53.09,11.43
  pour Bottom (isolate 0.305): 53.09,11.43 53.09,50.8 30.23,50.8 30.23,11.43
  pour Top (isolate 0.305): 30.23,11.43 30.23,50.8 53.09,50.8 53.09,11.43
GND2  (via drill 0.38)
  Top 0.178: U2.1 66.32,24.16 | 65.02,22.86 65.04,22.84 | J11.1 69.7,21.99 68.83,22.86 67.29,22.86 U2.17 65.04,22.84 | 63.75,24.13 63.74,24.14 U2.7 | D3.C 62.72,28.07 63.75,27.04 63.75,25.71 | 62.77,21.46 U2.10 64.36,22.2 65.02,22.86 | 62.77,21.46 62.77,21.05 65.02,18.8 R12.2 65.83,17.87 v66.29,17.4 | U2.3 65.02,24.13 | U2.5 63.75,25.71 | 63.75,25.71 63.75,24.77 | 63.75,24.77 63.75,24.13 | 62.77,21.46 62.73,21.5 C3.2 | U2.13 65.02,22.83 | 65.04,22.84 65.02,22.83 | 63.75,24.13 65.02,22.86 | U2.6 63.72,24.8 63.75,24.77 | U2.18 U2.21 65.02,22.86 | 65.02,22.86 65.02,22.83 | U2.9 65.04,22.84
  Bottom 0.178: JP7.2 69.28,20.38 v66.29,17.4 63.25,14.35 56.51,14.35 J9.1
  other vias: 69.53,22.03 61.21,25.02 67.06,26.54
  pour Top (isolate 0.305): 53.59,11.43 53.59,50.8 76.45,50.8 76.45,11.43
  pour Top (isolate 0.305): 76.45,11.43 76.45,50.8 53.59,50.8 53.59,11.43
  pour Top (isolate 0.305): 53.59,11.43 53.59,50.8 76.45,50.8 76.45,11.43
  pour Top (isolate 0.305): 76.45,50.8 53.59,50.8 53.59,11.43 76.45,11.43
  pour Top (isolate 0.305): 53.59,11.43 76.45,11.43 76.45,50.8 53.59,50.8
  pour Top (isolate 0.305): 76.45,50.8 53.59,50.8 53.59,11.43 76.45,11.43
  pour Top (isolate 0.305): 53.59,11.43 53.59,50.8 76.45,50.8 76.45,11.43
  pour Bottom (isolate 0.305): 76.45,11.43 76.45,50.8 53.59,50.8 53.59,11.43
  pour Top (isolate 0.305): 53.59,11.43 53.59,50.8 76.45,50.8 76.45,11.43
GND3  (via drill 0.38)
  Top 0.178: U3.1 89.69,24.16 | 88.39,22.86 88.41,22.84 | J15.1 93.07,21.99 92.2,22.86 90.66,22.86 U3.17 88.41,22.84 | 87.12,24.13 87.11,24.14 U3.7 | D4.C 86.09,28.07 87.12,27.04 87.12,25.71 | 86.14,21.46 U3.10 87.73,22.2 88.39,22.86 | 86.14,21.46 86.14,21.05 88.39,18.8 R17.2 89.19,17.87 v89.66,17.4 | U3.3 88.39,24.13 | U3.5 87.12,25.71 | 87.12,25.71 87.12,24.77 | 87.12,24.77 87.12,24.13 | 86.14,21.46 86.1,21.5 C4.2 | U3.13 88.39,22.83 | 88.41,22.84 88.39,22.83 | 87.12,24.13 88.39,22.86 | U3.6 87.09,24.8 87.12,24.77 | U3.18 U3.21 88.39,22.86 | 88.39,22.86 88.39,22.83 | U3.9 88.41,22.84
  Bottom 0.178: JP13.2 92.65,20.38 v89.66,17.4 86.61,14.35 79.88,14.35 J13.1
  other vias: 92.9,22.03 84.58,25.02 90.42,26.54
  pour Top (isolate 0.305): 76.96,11.43 76.96,50.8 99.82,50.8 99.82,11.43
  pour Top (isolate 0.305): 99.82,11.43 99.82,50.8 76.96,50.8 76.96,11.43
  pour Top (isolate 0.305): 76.96,11.43 76.96,50.8 99.82,50.8 99.82,11.43
  pour Top (isolate 0.305): 99.82,50.8 76.96,50.8 76.96,11.43 99.82,11.43
  pour Top (isolate 0.305): 76.96,11.43 99.82,11.43 99.82,50.8 76.96,50.8
  pour Top (isolate 0.305): 99.82,50.8 76.96,50.8 76.96,11.43 99.82,11.43
  pour Top (isolate 0.305): 76.96,11.43 76.96,50.8 99.82,50.8 99.82,11.43
  pour Bottom (isolate 0.305): 99.82,11.43 99.82,50.8 76.96,50.8 76.96,11.43
  pour Top (isolate 0.305): 76.96,11.43 76.96,50.8 99.82,50.8 99.82,11.43
GND4  (via drill 0.38)
  Top 0.178: U4.1 19.59,68.61 | 18.29,67.31 18.3,67.3 | J19.1 22.96,66.44 22.1,67.31 20.55,67.31 U4.17 18.3,67.3 | 17.02,68.58 17,68.59 U4.7 | D5.C 15.98,72.52 15.99,72.52 17.02,71.49 17.02,70.16 | 16.04,65.91 U4.10 17.62,66.65 18.29,67.31 | 16.04,65.91 16.04,65.5 18.29,63.25 R22.2 19.09,62.32 v19.56,61.85 | U4.3 18.29,68.58 | U4.5 17.02,70.16 | 17.02,70.16 17.02,69.22 | 17.02,69.22 17.02,68.58 | 16.04,65.91 16,65.95 C5.2 | U4.13 18.29,67.28 | 18.3,67.3 18.29,67.28 | 17.02,68.58 18.29,67.31 | U4.6 16.99,69.25 17.02,69.22 | U4.18 U4.21 18.29,67.31 | 18.29,67.31 18.29,67.28 | U4.9 18.3,67.3
  Bottom 0.178: JP17.2 22.54,64.83 v19.56,61.85 16.51,58.8 9.78,58.8 J17.1
  other vias: 22.8,66.48 14.48,69.47 20.32,70.99
  pour Top (isolate 0.305): 6.86,55.88 6.86,95.25 29.72,95.25 29.72,55.88
  pour Top (isolate 0.305): 29.72,55.88 29.72,95.25 6.86,95.25 6.86,55.88
  pour Top (isolate 0.305): 6.86,55.88 6.86,95.25 29.72,95.25 29.72,55.88
  pour Top (isolate 0.305): 29.72,95.25 6.86,95.25 6.86,55.88 29.72,55.88
  pour Top (isolate 0.305): 6.86,55.88 29.72,55.88 29.72,95.25 6.86,95.25
  pour Top (isolate 0.305): 29.72,95.25 6.86,95.25 6.86,55.88 29.72,55.88
  pour Top (isolate 0.305): 6.86,55.88 6.86,95.25 29.72,95.25 29.72,55.88
  pour Bottom (isolate 0.305): 29.72,55.88 29.72,95.25 6.86,95.25 6.86,55.88
  pour Top (isolate 0.305): 6.86,55.88 6.86,95.25 29.72,95.25 29.72,55.88
GND5  (via drill 0.38)
  Top 0.178: U5.1 42.96,68.61 | 41.66,67.31 41.67,67.3 | J23.1 46.33,66.44 45.47,67.31 43.92,67.31 U5.17 41.67,67.3 | 40.39,68.58 40.37,68.59 U5.7 | D6.C 39.35,72.52 39.36,72.52 40.39,71.49 40.39,70.16 | 39.41,65.91 U5.10 40.99,66.65 41.66,67.31 | 39.41,65.91 39.41,65.5 41.66,63.25 R27.2 42.46,62.32 v42.93,61.85 | U5.3 41.66,68.58 | U5.5 40.39,70.16 | 40.39,70.16 40.39,69.22 | 40.39,69.22 40.39,68.58 | 39.41,65.91 39.37,65.95 C6.2 | U5.13 41.66,67.28 | 41.67,67.3 41.66,67.28 | 40.39,68.58 41.66,67.31 | U5.6 40.36,69.25 40.39,69.22 | U5.18 U5.21 41.66,67.31 | 41.66,67.31 41.66,67.28 | U5.9 41.67,67.3
  Bottom 0.178: JP21.2 45.91,64.83 v42.93,61.85 39.88,58.8 33.15,58.8 J21.1
  other vias: 46.16,66.48 37.85,69.47 43.69,70.99
  pour Top (isolate 0.305): 30.23,55.88 30.23,95.25 53.09,95.25 53.09,55.88
  pour Top (isolate 0.305): 53.09,55.88 53.09,95.25 30.23,95.25 30.23,55.88
  pour Top (isolate 0.305): 30.23,55.88 30.23,95.25 53.09,95.25 53.09,55.88
  pour Top (isolate 0.305): 53.09,95.25 30.23,95.25 30.23,55.88 53.09,55.88
  pour Top (isolate 0.305): 30.23,55.88 53.09,55.88 53.09,95.25 30.23,95.25
  pour Top (isolate 0.305): 53.09,95.25 30.23,95.25 30.23,55.88 53.09,55.88
  pour Top (isolate 0.305): 30.23,55.88 30.23,95.25 53.09,95.25 53.09,55.88
  pour Bottom (isolate 0.305): 53.09,55.88 53.09,95.25 30.23,95.25 30.23,55.88
  pour Top (isolate 0.305): 30.23,55.88 30.23,95.25 53.09,95.25 53.09,55.88
GND6  (via drill 0.38)
  Top 0.178: U6.1 66.32,68.61 | 65.02,67.31 65.04,67.3 | J27.1 69.7,66.44 68.83,67.31 U6.17 65.04,67.3 | 63.75,68.58 63.74,68.59 U6.7 | D7.C 62.72,72.52 63.75,71.49 63.75,70.16 | 62.77,65.91 U6.10 64.36,66.65 65.02,67.31 | 62.77,65.91 62.77,65.5 65.02,63.25 R32.2 65.83,62.32 v66.29,61.85 | U6.3 65.02,68.58 | U6.5 63.75,70.16 | 63.75,70.16 63.75,69.22 | 63.75,69.22 63.75,68.58 | 62.77,65.91 62.73,65.95 C7.2 | U6.13 65.02,67.28 | 65.04,67.3 65.02,67.28 | 63.75,68.58 65.02,67.31 | U6.6 63.72,69.25 63.75,69.22 | U6.18 U6.21 65.02,67.31 | 65.02,67.31 65.02,67.28 | U6.9 65.04,67.3
  Bottom 0.178: JP25.2 69.28,64.83 v66.29,61.85 63.25,58.8 56.51,58.8 J25.1
  other vias: 69.53,66.48 61.21,69.47 67.06,70.99
  pour Top (isolate 0.305): 53.59,55.88 53.59,95.25 76.45,95.25 76.45,55.88
  pour Top (isolate 0.305): 76.45,55.88 76.45,95.25 53.59,95.25 53.59,55.88
  pour Top (isolate 0.305): 53.59,55.88 53.59,95.25 76.45,95.25 76.45,55.88
  pour Top (isolate 0.305): 76.45,95.25 53.59,95.25 53.59,55.88 76.45,55.88
  pour Top (isolate 0.305): 53.59,55.88 76.45,55.88 76.45,95.25 53.59,95.25
  pour Top (isolate 0.305): 76.45,95.25 53.59,95.25 53.59,55.88 76.45,55.88
  pour Top (isolate 0.305): 53.59,55.88 53.59,95.25 76.45,95.25 76.45,55.88
  pour Bottom (isolate 0.305): 76.45,55.88 76.45,95.25 53.59,95.25 53.59,55.88
  pour Top (isolate 0.305): 53.59,55.88 53.59,95.25 76.45,95.25 76.45,55.88
GND7  (via drill 0.38)
  Top 0.178: U7.1 89.69,68.61 | 88.39,67.31 88.41,67.3 | J31.1 93.07,66.44 92.2,67.31 90.66,67.31 U7.17 88.41,67.3 | 87.12,68.58 87.11,68.59 U7.7 | D8.C 86.09,72.52 87.12,71.49 87.12,70.16 | 86.14,65.91 U7.10 87.73,66.65 88.39,67.31 | 86.14,65.91 86.14,65.5 88.39,63.25 R37.2 89.19,62.32 v89.66,61.85 | U7.3 88.39,68.58 | U7.5 87.12,70.16 | 87.12,70.16 87.12,69.22 | 87.12,69.22 87.12,68.58 | 86.14,65.91 86.1,65.95 C8.2 | U7.13 88.39,67.28 | 88.41,67.3 88.39,67.28 | 87.12,68.58 88.39,67.31 | U7.6 87.09,69.25 87.12,69.22 | U7.18 U7.21 88.39,67.31 | 88.39,67.31 88.39,67.28 | U7.9 88.41,67.3
  Bottom 0.178: JP29.2 92.65,64.83 v89.66,61.85 86.61,58.8 79.88,58.8 J29.1
  other vias: 92.9,66.48 84.58,69.47 90.42,70.99
  pour Top (isolate 0.305): 76.96,55.88 76.96,95.25 99.82,95.25 99.82,55.88
  pour Top (isolate 0.305): 99.82,55.88 99.82,95.25 76.96,95.25 76.96,55.88
  pour Top (isolate 0.305): 76.96,55.88 76.96,95.25 99.82,95.25 99.82,55.88
  pour Top (isolate 0.305): 99.82,95.25 76.96,95.25 76.96,55.88 99.82,55.88
  pour Top (isolate 0.305): 76.96,55.88 99.82,55.88 99.82,95.25 76.96,95.25
  pour Top (isolate 0.305): 99.82,95.25 76.96,95.25 76.96,55.88 99.82,55.88
  pour Top (isolate 0.305): 76.96,55.88 76.96,95.25 99.82,95.25 99.82,55.88
  pour Bottom (isolate 0.305): 99.82,55.88 99.82,95.25 76.96,95.25 76.96,55.88
  pour Top (isolate 0.305): 76.96,55.88 76.96,95.25 99.82,95.25 99.82,55.88
N$1
  Top 0.178: D1.A 13.6,27.33 R1.2
N$2  (via drill 0.38)
  Top 0.178: R5.2 15.75,18.71 v15.75,17.78 | v24.26,26.61 23.75,27.11 I2C.1
  Bottom 0.178: v24.26,26.61 24.26,26.29 v15.75,17.78
N$3  (via drill 0.38)
  Top 0.178: v22.35,26.54 21.72,27.18 I2C.3 | v13.21,19.05 R4.2
  Bottom 0.178: v22.35,26.54 22.35,25.53 15.88,19.05 v13.21,19.05
N$4
  Top 0.381: U16.2 18.94,28.59 25.15,34.8 JP2.+
N$5
  Top 0.381: U16.4 17.64,28.59 11.43,34.8 JP2.-
N$6
  Top 0.178: D2.A 36.97,27.33 R6.2
N$7  (via drill 0.38)
  Top 0.178: R9.2 39.12,18.71 v39.12,17.78 | v47.62,26.61 47.12,27.11 I2C1.1
  Bottom 0.178: v47.62,26.61 47.62,26.29 v39.12,17.78
N$8  (via drill 0.38)
  Top 0.178: v45.72,26.54 45.08,27.18 I2C1.3 | v36.58,19.05 R8.2
  Bottom 0.178: v45.72,26.54 45.72,25.53 39.24,19.05 v36.58,19.05
N$9
  Top 0.381: U1.2 42.31,28.59 48.51,34.8 JP6.+
N$10
  Top 0.381: U1.4 41.01,28.59 34.8,34.8 JP6.-
N$11
  Top 0.178: D3.A 60.34,27.33 R11.2
N$12  (via drill 0.38)
  Top 0.178: R14.2 62.48,18.71 v62.48,17.78 | v70.99,26.61 70.48,27.11 I2C2.1
  Bottom 0.178: v70.99,26.61 70.99,26.29 v62.48,17.78
N$13  (via drill 0.38)
  Top 0.178: v69.09,26.54 68.45,27.18 I2C2.3 | v59.94,19.05 R13.2
  Bottom 0.178: v69.09,26.54 69.09,25.53 62.61,19.05 v59.94,19.05
N$14
  Top 0.381: U2.2 65.67,28.59 71.88,34.8 JP12.+
N$15
  Top 0.381: U2.4 64.37,28.59 58.17,34.8 JP12.-
N$16
  Top 0.178: D4.A 83.7,27.33 R16.2
N$17  (via drill 0.38)
  Top 0.178: R19.2 85.85,18.71 v85.85,17.78 | v94.36,26.61 93.85,27.11 I2C3.1
  Bottom 0.178: v94.36,26.61 94.36,26.29 v85.85,17.78
N$18  (via drill 0.38)
  Top 0.178: v92.46,26.54 91.82,27.18 I2C3.3 | v83.31,19.05 R18.2
  Bottom 0.178: v92.46,26.54 92.46,25.53 85.98,19.05 v83.31,19.05
N$19
  Top 0.381: U3.2 89.04,28.59 95.25,34.8 JP16.+
N$20
  Top 0.381: U3.4 87.74,28.59 81.53,34.8 JP16.-
N$21
  Top 0.178: D5.A 13.6,71.78 R21.2
N$22  (via drill 0.38)
  Top 0.178: R24.2 15.75,63.16 v15.75,62.23 | v24.26,71.06 23.75,71.56 I2C4.1
  Bottom 0.178: v24.26,71.06 24.26,70.74 v15.75,62.23
N$23  (via drill 0.38)
  Top 0.178: v22.35,70.99 21.72,71.63 I2C4.3 | v13.21,63.5 R23.2
  Bottom 0.178: v22.35,70.99 22.35,69.98 15.88,63.5 v13.21,63.5
N$24
  Top 0.381: U4.2 18.94,73.04 25.15,79.25 JP20.+
N$25
  Top 0.381: U4.4 17.64,73.04 11.43,79.25 JP20.-
N$26
  Top 0.178: D6.A 36.97,71.78 R26.2
N$27  (via drill 0.38)
  Top 0.178: R29.2 39.12,63.16 v39.12,62.23 | v47.62,71.06 47.12,71.56 I2C5.1
  Bottom 0.178: v47.62,71.06 47.62,70.74 v39.12,62.23
N$28  (via drill 0.38)
  Top 0.178: v45.72,70.99 45.08,71.63 I2C5.3 | v36.58,63.5 R28.2
  Bottom 0.178: v45.72,70.99 45.72,69.98 39.24,63.5 v36.58,63.5
N$29
  Top 0.381: U5.2 42.31,73.04 48.51,79.25 JP24.+
N$30
  Top 0.381: U5.4 41.01,73.04 34.8,79.25 JP24.-
N$31
  Top 0.178: D7.A 60.34,71.78 R31.2
N$32  (via drill 0.38)
  Top 0.178: R34.2 62.48,63.16 v62.48,62.23 | v70.99,71.06 70.48,71.56 I2C6.1
  Bottom 0.178: v70.99,71.06 70.99,70.74 v62.48,62.23
N$33  (via drill 0.38)
  Top 0.178: v69.09,70.99 68.45,71.63 I2C6.3 | v59.94,63.5 R33.2
  Bottom 0.178: v69.09,70.99 69.09,69.98 62.61,63.5 v59.94,63.5
N$34
  Top 0.381: U6.2 65.67,73.04 71.88,79.25 JP28.+
N$35
  Top 0.381: U6.4 64.37,73.04 58.17,79.25 JP28.-
N$36
  Top 0.178: D8.A 83.7,71.78 R36.2
N$37  (via drill 0.38)
  Top 0.178: R39.2 85.85,63.16 v85.85,62.23 | v94.36,71.06 93.85,71.56 I2C7.1
  Bottom 0.178: v94.36,71.06 94.36,70.74 v85.85,62.23
N$38  (via drill 0.38)
  Top 0.178: v92.46,70.99 91.82,71.63 I2C7.3 | v83.31,63.5 R38.2
  Bottom 0.178: v92.46,70.99 92.46,69.98 85.98,63.5 v83.31,63.5
N$39
  Top 0.381: U7.2 89.04,73.04 95.25,79.25 JP32.+
N$40
  Top 0.381: U7.4 87.74,73.04 81.53,79.25 JP32.-
SCL  (via drill 0.38)
  Top 0.178: J2.4 24.23,24.99 v23.37,24.13 23.35,24.14 U16.19 | J1.4 14.41,14.03 v14.41,16.51 14.41,19.03 R5.1 11.94,21.5 J3.4
  Bottom 0.178: v23.37,24.13 22.99,24.13 16.95,18.1 16.7,18.1 16.38,17.78 16.38,17.4 15.49,16.51 v14.41,16.51
SCL1  (via drill 0.38)
  Top 0.178: J7.4 47.6,24.99 v46.74,24.13 46.72,24.14 U1.19 | J5.4 37.78,14.03 v37.78,16.51 37.78,19.03 R9.1 35.31,21.5 J6.4
  Bottom 0.178: v46.74,24.13 46.35,24.13 40.32,18.1 40.07,18.1 39.75,17.78 39.75,17.4 38.86,16.51 v37.78,16.51
SCL2  (via drill 0.38)
  Top 0.178: J11.4 70.97,24.99 v70.1,24.13 70.09,24.14 U2.19 | J9.4 61.15,14.03 v61.15,16.51 61.15,19.03 R14.1 58.67,21.5 J10.4
  Bottom 0.178: v70.1,24.13 69.72,24.13 63.69,18.1 63.44,18.1 63.12,17.78 63.12,17.4 62.23,16.51 v61.15,16.51
SCL3  (via drill 0.38)
  Top 0.178: J15.4 94.34,24.99 v93.47,24.13 93.46,24.14 U3.19 | J13.4 84.52,14.03 v84.52,16.51 84.52,19.03 R19.1 82.04,21.5 J14.4
  Bottom 0.178: v93.47,24.13 93.09,24.13 87.06,18.1 86.81,18.1 86.49,17.78 86.49,17.4 85.6,16.51 v84.52,16.51
SCL4  (via drill 0.38)
  Top 0.178: J19.4 24.23,69.44 v23.37,68.58 23.35,68.59 U4.19 | J17.4 14.41,58.48 v14.41,60.96 14.41,63.48 R24.1 11.94,65.95 J18.4
  Bottom 0.178: v23.37,68.58 22.99,68.58 16.95,62.55 16.7,62.55 16.38,62.23 16.38,61.85 15.49,60.96 v14.41,60.96
SCL5  (via drill 0.38)
  Top 0.178: J23.4 47.6,69.44 v46.74,68.58 46.72,68.59 U5.19 | J21.4 37.78,58.48 v37.78,60.96 37.78,63.48 R29.1 35.31,65.95 J22.4
  Bottom 0.178: v46.74,68.58 46.35,68.58 40.32,62.55 40.07,62.55 39.75,62.23 39.75,61.85 38.86,60.96 v37.78,60.96
SCL6  (via drill 0.38)
  Top 0.178: J27.4 70.97,69.44 v70.1,68.58 70.09,68.59 U6.19 | J25.4 61.15,58.48 v61.15,60.96 61.15,63.48 R34.1 58.67,65.95 J26.4
  Bottom 0.178: v70.1,68.58 69.72,68.58 63.69,62.55 63.44,62.55 63.12,62.23 63.12,61.85 62.23,60.96 v61.15,60.96
SCL7  (via drill 0.38)
  Top 0.178: J31.4 94.34,69.44 v93.47,68.58 93.46,68.59 U7.19 | J29.4 84.52,58.48 v84.52,60.96 84.52,63.48 R39.1 82.04,65.95 J30.4
  Bottom 0.178: v93.47,68.58 93.09,68.58 87.06,62.55 86.81,62.55 86.49,62.23 86.49,61.85 85.6,60.96 v84.52,60.96
SDA  (via drill 0.38)
  Top 0.178: J1.3 10.2,15.71 R4.1 10.2,19.85 10.9,20.55 10.9,22.33 11.56,22.99 J3.3 v13.21,22.99 | J2.3 24.99,23.99 25.58,24.59 25.58,25.41 25.39,25.59 v21.4,25.59 20.6,24.8 U16.20
  Bottom 0.178: v13.21,22.99 18.8,22.99 v21.4,25.59
SDA1  (via drill 0.38)
  Top 0.178: J5.3 33.57,15.71 R8.1 33.57,19.85 34.27,20.55 34.27,22.33 34.93,22.99 J6.3 v36.58,22.99 | J7.3 48.36,23.99 48.95,24.59 48.95,25.41 48.76,25.59 v44.77,25.59 43.97,24.8 U1.20
  Bottom 0.178: v36.58,22.99 42.16,22.99 v44.77,25.59
SDA2  (via drill 0.38)
  Top 0.178: J9.3 56.93,15.71 R13.1 56.93,19.85 57.63,20.55 57.63,22.33 58.3,22.99 J10.3 v59.94,22.99 | J11.3 71.73,23.99 72.32,24.59 72.32,25.41 72.13,25.59 v68.14,25.59 67.34,24.8 U2.20
  Bottom 0.178: v59.94,22.99 65.53,22.99 v68.14,25.59
SDA3  (via drill 0.38)
  Top 0.178: J13.3 80.3,15.71 R18.1 80.3,19.85 81,20.55 81,22.33 81.66,22.99 J14.3 82.05,22.99 v83.31,22.99 | J15.3 95.09,23.99 95.68,24.59 95.68,25.41 95.5,25.59 v91.5,25.59 90.71,24.8 U3.20
  Bottom 0.178: v83.31,22.99 88.9,22.99 v91.5,25.59
SDA4  (via drill 0.38)
  Top 0.178: J17.3 10.2,60.16 R23.1 10.2,64.3 10.9,65 10.9,66.78 11.56,67.44 J18.3 11.95,67.44 v13.21,67.44 | J19.3 24.99,68.44 25.58,69.03 25.58,69.85 25.39,70.04 v21.4,70.04 20.6,69.25 U4.20
  Bottom 0.178: v13.21,67.44 18.8,67.44 v21.4,70.04
SDA5  (via drill 0.38)
  Top 0.178: J21.3 33.57,60.16 R28.1 33.57,64.3 34.27,65 34.27,66.78 34.93,67.44 J22.3 35.31,67.44 v36.58,67.44 | J23.3 48.36,68.44 48.95,69.03 48.95,69.85 48.76,70.04 v44.77,70.04 43.97,69.25 U5.20
  Bottom 0.178: v36.58,67.44 42.16,67.44 v44.77,70.04
SDA6  (via drill 0.38)
  Top 0.178: J25.3 56.93,60.16 R33.1 56.93,64.3 57.63,65 57.63,66.78 58.3,67.44 J26.3 58.68,67.44 v59.94,67.44 | J27.3 71.73,68.44 72.32,69.03 72.32,69.85 72.13,70.04 v68.14,70.04 67.34,69.25 U6.20
  Bottom 0.178: v59.94,67.44 65.53,67.44 v68.14,70.04
SDA7  (via drill 0.38)
  Top 0.178: J29.3 80.3,60.16 R38.1 80.3,64.3 81,65 81,66.78 81.66,67.44 J30.3 82.05,67.44 v83.31,67.44 | J31.3 95.09,68.44 95.68,69.03 95.68,69.85 95.5,70.04 v91.5,70.04 90.71,69.25 U7.20
  Bottom 0.178: v83.31,67.44 88.9,67.44 v91.5,70.04

## Text on the board
Bottom: x01 | x01 | x01 | x01 | x01 | x01 | x01 | x01
Dimension: Route Out | Route Out | Route Out | Route Out | Route Out | Route Out | Route Out | Route Out | Route Out | Route Out | Route Out | Route Out
bPlace: Connector body / is on this side! | Connector body / is on this side! | Connector body / is on this side! | Connector body / is on this side! | Connector body / is on this side! | Connector body / is on this side! | Connector body / is on this side! | Connector body / is on this side!
Milling: v-score | v-score | v-score | v-score | v-score